# EAGLE board TI_MotorController (EAGLE 9.4.2)
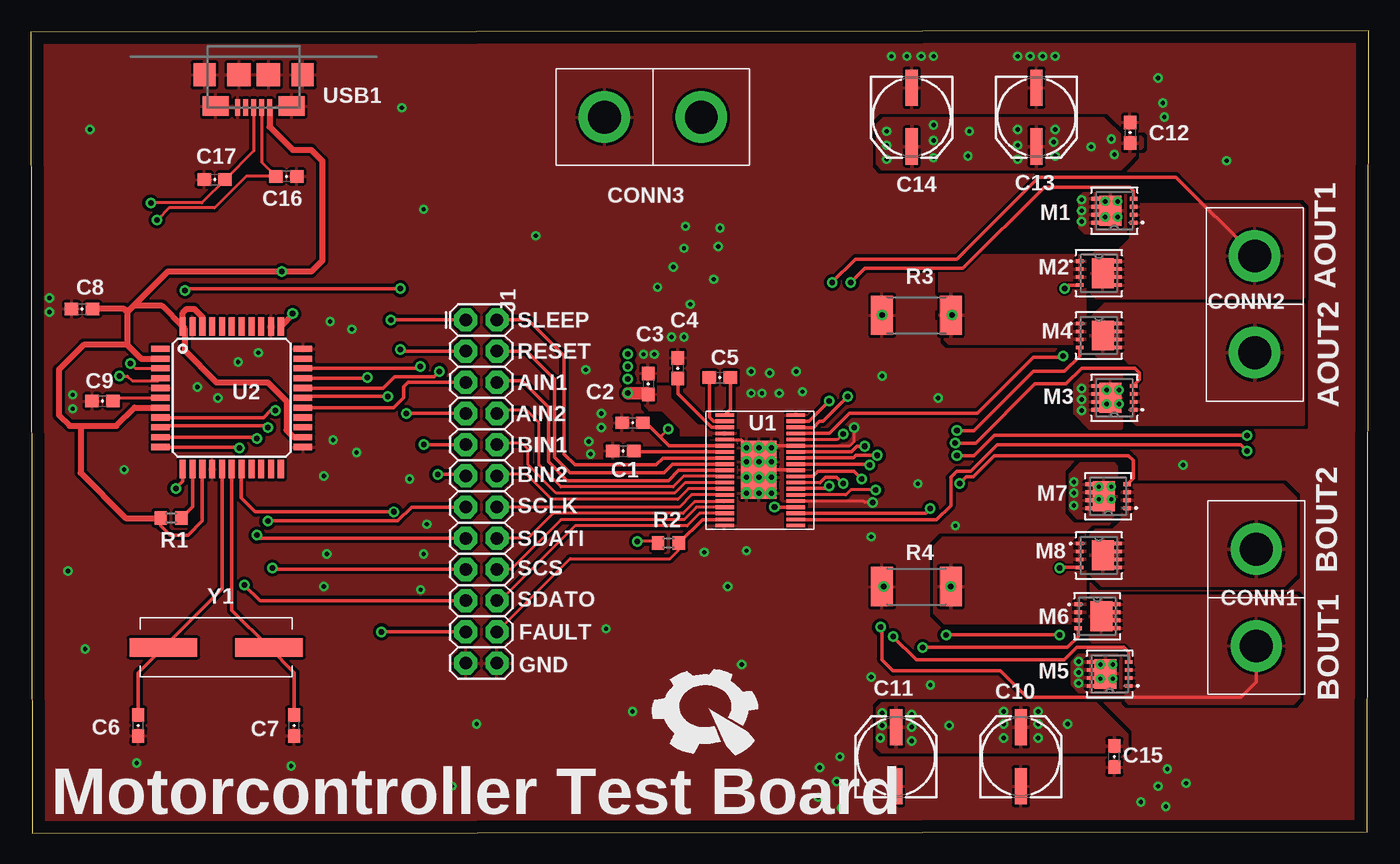
[diagram p0: board, top side]
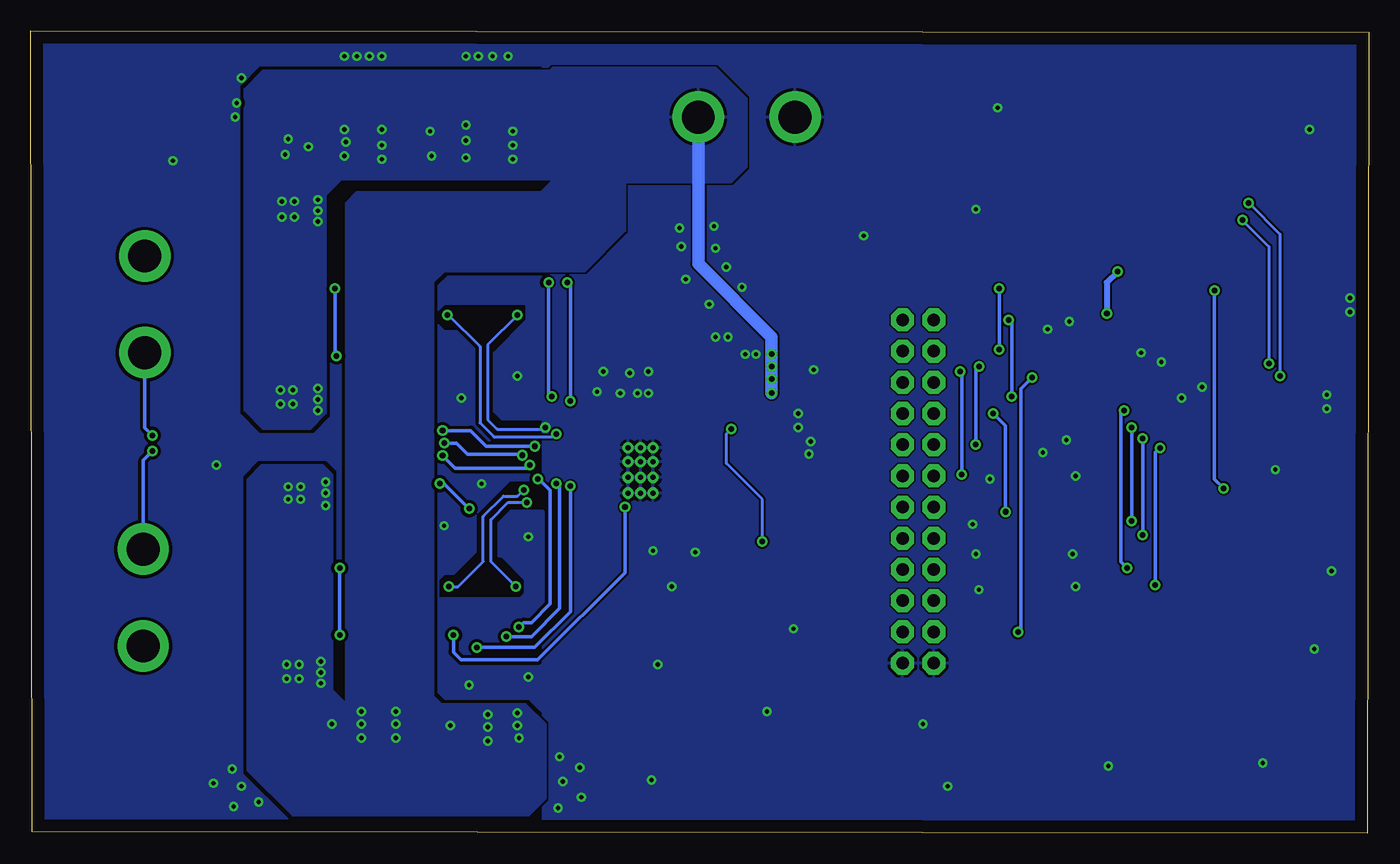
[diagram p1: board, bottom side, seen from below]

Size 108.99 x 65.33 mm. Coordinates in mm from the lower left corner, seen from the top.
Outline: 0.13,0 108.86,0.13 108.99,65.33 0,65.2 0.13,0
Copper layers (1*16): Top 0.035mm / dielectric 1.5mm / Bottom 0.035mm
Design rules "default": minimum track width 6mil, minimum drill 0.35mm, track to track 6mil, track to pad 6mil, pad to pad 6mil, via to via 6mil, smd to smd 6mil, copper to edge 40mil, drill to drill 6mil, minimum pad ring 10mil, minimum via ring 8mil, stop-mask expansion 4mil, vias tented up to drill 0mil, thermal gap 10mil

## Footprints (pad centres in the part's own frame; a part is rotated, then mirrored left to right if it is on the bottom)
0603-CAP = smd 1.1 x 1: 1 -0.85,0; 2 0.85,0
NIPPON_F80 = smd 2.95 x 1: + 2.4,0; - -2.4,0
ANDERSON_VERTICAL = drill 2.667 pad 4.191: PIN1 0,-3.937; PIN2 0,3.937
2X12 = drill 1.016 pad 1.88 octagon: 1 0,0; 2 0,2.54; 3 2.54,0; 4 2.54,2.54; 5 5.08,0; 6 5.08,2.54; 7 7.62,0; 8 7.62,2.54; 9 10.16,0; 10 10.16,2.54; 11 12.7,0; 12 12.7,2.54; 13 15.24,0; 14 15.24,2.54; 15 17.78,0; 16 17.78,2.54; 17 20.32,0; 18 20.32,2.54; 19 22.86,0; 20 22.86,2.54; 21 25.4,0; 22 25.4,2.54; 23 27.94,0; 24 27.94,2.54
DNH0008A = smd 0.61 x 0.305: 1 -1.55,0.975; 2 -1.55,0.325; 3 -1.55,-0.325; 4 -1.55,-0.975 | smd 0.635 x 0.305: 5 1.55,-0.975; 6 1.55,-0.325; 7 1.55,0.325; 8 1.55,0.975 | smd 1.778 x 2.438: 9 0.343,0
R0603 = smd 1 x 1.1: 1 -0.85,0; 2 0.85,0
R2512 = smd 1.8 x 3.2: 1 -2.8,0; 2 2.8,0
HTSSOP(38) = smd 1.5 x 0.3: P1 -2.794,4.064; P2 -2.794,3.564; P3 -2.794,3.064; P4 -2.794,2.564; P5 -2.794,2.064; P6 -2.794,1.564; P7 -2.794,1.064; P8 -2.794,0.564; P9 -2.794,0.064; P10 -2.794,-0.436; P11 -2.794,-0.936; P12 -2.794,-1.436; P13 -2.794,-1.936; P14 -2.794,-2.436; P15 -2.794,-2.936; P16 -2.794,-3.436; P17 -2.794,-3.936; P18 -2.794,-4.436; P19 -2.794,-4.936; P20 3.006,-4.936; P21 3.006,-4.436; P22 3.006,-3.936; P23 3.006,-3.436; P24 3.006,-2.936; P25 3.006,-2.436; P26 3.006,-1.936; P27 3.006,-1.436; P28 3.006,-0.936; P29 3.006,-0.436; P30 3.006,0.064; P31 3.006,0.564; P32 3.006,1.064; P33 3.006,1.564; P34 3.006,2.064; P35 3.006,2.564; P36 3.006,3.064; P37 3.006,3.564; P38 3.006,4.064 | smd 2.9 x 4.7: P39 0,-0.381 | drill 0.4: P40 -1.016,1.397; P41 0,1.397; P42 1.016,1.397; P43 0,-2.286; P44 1.016,-2.286; P45 -1.016,-2.286; P46 -1.016,-1.016; P47 0,-1.016; P48 1.016,-1.016; P49 1.016,0.254; P50 0,0.254; P51 -1.016,0.254
TQFP44 = smd 1.5 x 0.5: 1 -5.8,4; 2 -5.8,3.2; 3 -5.8,2.4; 4 -5.8,1.6; 5 -5.8,0.8; 6 -5.8,0; 7 -5.8,-0.8; 8 -5.8,-1.6; 9 -5.8,-2.4; 10 -5.8,-3.2; 11 -5.8,-4; 23 5.8,-4; 24 5.8,-3.2; 25 5.8,-2.4; 26 5.8,-1.6; 27 5.8,-0.8; 28 5.8,0; 29 5.8,0.8; 30 5.8,1.6; 31 5.8,2.4; 32 5.8,3.2; 33 5.8,4 | smd 0.5 x 1.5: 12 -4,-5.8; 13 -3.2,-5.8; 14 -2.4,-5.8; 15 -1.6,-5.8; 16 -0.8,-5.8; 17 0,-5.8; 18 0.8,-5.8; 19 1.6,-5.8; 20 2.4,-5.8; 21 3.2,-5.8; 22 4,-5.8; 34 4,5.8; 35 3.2,5.8; 36 2.4,5.8; 37 1.6,5.8; 38 0.8,5.8; 39 0,5.8; 40 -0.8,5.8; 41 -1.6,5.8; 42 -2.4,5.8; 43 -3.2,5.8; 44 -4,5.8
USB-MICRO-AB = smd 0.4 x 1.35: P$1 -1.3,1; P$2 -0.65,1; P$3 0,1; P$4 0.65,1; P$5 1.3,1 | smd 2.1 x 1.6: P$6 -3.1,0.875; P$7 3.1,0.875 | smd 1.8 x 1.9: P$8 -4,-1.675; P$9 4,-1.675 | smd 1.9 x 1.9: P$10 -1.2,-1.675; P$11 1.2,-1.675
CRYSTAL-SMD-10.5X4.8-2PIN = smd 5.5 x 1.5: P$1 -4.3,0; P$2 4.3,0

## Placement (x,y rotation side)
C1  1uF  [0603-CAP]  48.26,31.11 0 top
C2  .1uF  [0603-CAP]  49.02,33.4 0 top
C3  .1uF  [0603-CAP]  50.29,36.58 270 top
C4  1uF  [0603-CAP]  52.71,37.85 270 top
C5  .1uF  [0603-CAP]  56.13,37.08 0 top
C6  18pF  [0603-CAP]  8.76,8.76 90 top
C7  18pF  [0603-CAP]  21.46,8.76 90 top
C8  1uF  [0603-CAP]  4.19,42.67 0 top
C9  1uF  [0603-CAP]  5.84,35.18 0 top
C10  220uF  [NIPPON_F80]  80.64,6.22 90 top
C11  220uF  [NIPPON_F80]  70.48,6.22 90 top
C12  .1uF  [0603-CAP]  89.53,57.02 270 top
C13  220uF  [NIPPON_F80]  81.91,58.29 270 top
C14  220uF  [NIPPON_F80]  71.75,58.29 270 top
C15  .1uF  [0603-CAP]  88.27,6.22 90 top
C16  47pF  [0603-CAP]  20.83,53.47 180 top
C17  47pF  [0603-CAP]  14.99,53.21 0 top
CONN1  ANDERSONVERTICAL  [ANDERSON_VERTICAL]  99.82,19.18 0 top
CONN2  ANDERSONVERTICAL  [ANDERSON_VERTICAL]  99.69,43.05 180 top
CONN3  ANDERSONVERTICAL  [ANDERSON_VERTICAL]  50.67,58.29 90 top
J1  CONN_12X2  [2X12]  35.43,41.78 270 top
M1  NMOS_CSD17579Q3A  [DNH0008A]  88.27,50.67 180 top
M2  NMOS_CSD17579Q3A  [DNH0008A]  86.99,45.59 0 top
M3  NMOS_CSD17579Q3A  [DNH0008A]  88.27,35.43 180 top
M4  NMOS_CSD17579Q3A  [DNH0008A]  86.99,40.51 0 top
M5  NMOS_CSD17579Q3A  [DNH0008A]  87.88,12.95 180 top
M6  NMOS_CSD17579Q3A  [DNH0008A]  86.87,17.65 0 top
M7  NMOS_CSD17579Q3A  [DNH0008A]  87.76,27.43 180 top
M8  NMOS_CSD17579Q3A  [DNH0008A]  86.99,22.61 0 top
R1  10k  [R0603]  11.43,25.65 0 top
R2  10k  [R0603]  51.94,23.62 0 top
R3  10m  [R2512]  72.14,42.16 0 top
R4  10m  [R2512]  72.14,20.07 0 top
U1  DRV8704  [HTSSOP(38)]  59.31,29.97 0 top
U2  ATMEGA32U4-AU  [TQFP44]  16.38,35.43 0 top
U$1  [PIE-LOGO-SMALL]  55.25,10.16 0 top
USB1  USB-OTGMICRO-AB  [USB-MICRO-AB]  18.16,60.07 180 top
Y1  [CRYSTAL-SMD-10.5X4.8-2PIN]  15.11,15.11 0 top

## Library data of the parts
C1-C4 C6-C9 C12 C15-C17 = pie; PIE-INT-REF-NUM: CAPACITOR-GENERIC
C5 = pie; PIE-INT-REF-NUM: CAPACITOR-GENERIC; VMAX: 16V
C10 C11 C13 C14 U$1 = pie
CONN1-CONN3 = pie; PIE-INT-REF-NUM: Anderson
J1 = SparkFun-Connectors
M1-M8 = pie; PART_NO: CSD17579Q3A
R1 R2 = pie; DESCRIPTION: RESISTOR, American symbol; DISTRIBUTOR: DigiKey; MANUFACTURER: Rohm Semiconductor; NOTES: Cut Tape; PACKAGE: R0603
R3 R4 = pie; PIE-INT-REF-NUM: RESISTOR-GENERIC
U1 = pie; PART_NO: DRV8704
U2 = pie; PIE-DIGIKEY-PN-ALT1: ATMEGA32U4-MURCT-ND; PIE-DIGIKEY-PN-PRI: ATMEGA32U4RC-MURCT-ND; PIE-INT-REF-NUM: ATmega32U4
USB1 = pie; PIE-DIGIKEY-PN-PRI: H11635CT-ND; PIE-INT-REF-NUM: USB
Y1 = pie; PIE-INT-REF-NUM: CRYSTAL

## Nets
5V: C8.2 R1.1 U2.2 U2.7 U2.14 U2.24 U2.34 U2.42 U2.44 USB1.P$1
12V: C3.2 C10.+ C11.+ C12.2 C13.+ C14.+ C15.2 CONN3.PIN1 M1.5 M1.6 M1.7 M1.8 M1.9 M3.5 M3.6 M3.7 M3.8 M3.9 M5.5 M5.6 M5.7 M5.8 M5.9 M7.5 M7.6 M7.7 M7.8 M7.9 U1.P4
A1HS: M1.4 U1.P36
A1LS: M2.4 U1.P35
A2HS: M3.4 U1.P31
A2LS: M4.4 U1.P32
AIN1: J1.5 U2.27
AIN1M: J1.6 U1.P10
AIN2: J1.7 U2.18
AIN2M: J1.8 U1.P11
AISENP: M2.1 M2.2 M2.3 M4.1 M4.2 M4.3 R3.2 U1.P34
AOUT1: CONN2.PIN1 M1.1 M1.2 M1.3 M2.5 M2.6 M2.7 M2.8 M2.9 U1.P37
AOUT2: CONN2.PIN2 M3.1 M3.2 M3.3 M4.5 M4.6 M4.7 M4.8 M4.9 U1.P30
B1HS: M5.4 U1.P27
B1LS: M6.4 U1.P26
B2HS: M7.4 U1.P22
B2LS: M8.4 U1.P23
BIN1: J1.9 U2.31
BIN1M: J1.10 U1.P12
BIN2: J1.11 U2.29
BIN2M: J1.12 U1.P13
BOUT1: CONN1.PIN1 M5.1 M5.2 M5.3 M6.5 M6.6 M6.7 M6.8 M6.9 U1.P28
BOUT2: CONN1.PIN2 M7.1 M7.2 M7.3 M8.5 M8.6 M8.7 M8.8 M8.9 U1.P21
D+: C17.2 U2.4 USB1.P$3
D-: C16.2 U2.3 USB1.P$2
FAULTN: J1.21 U2.30
FAULTNM: J1.22 R2.2 U1.P18
GND: C1.1 C2.1 C3.1 C4.1 C6.1 C7.1 C8.1 C9.1 C10.- C11.- C12.1 C13.- C14.- C15.1 C16.1 C17.1 CONN3.PIN2 J1.23 J1.24 R3.1 R4.1 U1.P5 U1.P19 U1.P24 U1.P29 U1.P33 U1.P38 U1.P39 U1.P40 U1.P41 U1.P42 U1.P43 U1.P44 U1.P45 U1.P46 U1.P47 U1.P48 U1.P49 U1.P50 U1.P51 U2.5 U2.15 U2.23 U2.33 U2.35 U2.43 USB1.P$5 USB1.P$6 USB1.P$7 USB1.P$8 USB1.P$9 USB1.P$10 USB1.P$11
N$1: C1.2 U1.P7
N$2: C2.2 R2.1 U1.P6
N$3: R1.2 U2.13
N$4: C4.2 U1.P3
N$5: C5.1 U1.P2
N$6: C5.2 U1.P1
N$7: C7.2 U2.17 Y1.P$2
N$8: C6.2 U2.16 Y1.P$1
N$11: C9.2 U2.6
N$16: M6.1 M6.2 M6.3 M8.1 M8.2 M8.3 R4.2 U1.P25
RESET: J1.3 U2.12
RESETM: J1.4 U1.P9
SCLK: J1.13 U2.9
SCLKM: J1.14 U1.P14
SCS: J1.17 U2.8
SCSM: J1.18 U1.P16
SDATI: J1.15 U2.10
SDATIM: J1.16 U1.P15
SDATO: J1.19 U2.11
SDATOM: J1.20 U1.P17
SLEEP: J1.1 U2.28
SLEEPM: J1.2 U1.P8

## Tracks (layer width: path | path; a pad name or v marks a point on that pad's centre or on a via)
5V  (via drill 0.45)
  Top 0.305: U2.14 13.98,25.41 12.83,24.26 11.34,24.26 10.58,25.02 R1.1
  Top 0.508: USB1.P$1 19.46,57.5 21.34,55.63 22.86,55.63 23.75,54.74 23.75,46.61 22.86,45.72 v20.45,45.72 11.18,45.72 8.38,42.93 | v21.34,42.29 21.34,42.19 U2.34 | 8.38,42.93 7.87,42.42 | 7.87,42.42 7.87,39.75 | 7.87,39.75 9.02,38.61 9.04,38.63 U2.2 | U2.44 10.69,42.93 8.38,42.93 | U2.44 12.38,42.35 12.7,42.67 13.34,42.67 13.98,42.02 U2.42 | 7.87,39.75 4.32,39.75 2.29,37.72 2.29,34.04 3.17,33.15 4.06,33.15 | 7.87,42.42 7.62,42.67 C8.2 | 4.06,33.15 6.98,33.15 8.47,34.63 U2.7 | 4.06,33.15 4.06,29.34 7.75,25.65 R1.1 | U2.44 12.53,41.09 12.53,39.3 15.12,36.7 19.3,36.7 20.83,35.18 20.83,32.81 21.41,32.23 U2.24
  Bottom 0.508: v20.45,45.72 21.34,44.83 v21.34,42.29
12V  (via drill 0.35, 0.45)
  Top 0.813: 50.25,35.69 C3.2
  Top 1.016: v48.64,35.81 50.13,35.81 50.25,35.69
  Bottom 1.016: CONN3.PIN1 54.61,46.35 48.64,40.39 v48.64,38.99 v48.64,37.97 v48.64,36.96 v48.64,35.81
  other vias: 69.72,57.15 69.72,56.01 69.72,54.86 73.53,57.66 73.53,56.39 73.53,54.99 76.45,57.15 76.33,55.12 80.39,57.28 80.39,56.01 80.39,54.86 83.44,57.28 83.31,56.26 83.44,55.12 88.01,56.52 88.27,55.24 86.36,55.88 69.34,9.78 69.34,8.76 69.21,7.75 71.75,9.65 71.75,8.64 71.75,7.49 74.8,8.76 79.25,9.91 79.25,8.89 79.25,7.75 82.04,9.91 82.04,8.89 82.04,7.75 84.45,8.89 87.5,51.44 88.52,51.44 87.5,50.16 88.52,50.16 85.6,51.56 85.6,50.67 85.6,49.78 87.63,36.07 88.65,36.07 87.63,34.92 88.65,34.92 85.6,36.2 85.6,35.31 85.6,34.42 86.99,28.19 88.01,28.19 88.01,27.18 86.99,27.18 84.96,28.57 84.96,27.69 84.96,26.67 87.12,13.72 88.14,13.72 87.12,12.57 88.14,12.57 85.34,13.97 85.34,13.08 85.34,12.19
  pour Bottom (isolate 0.254): 90.04,62.1 53.21,62.1 50.67,59.56 50.67,54.48 51.94,53.21 83.69,53.21 84.96,51.94 84.96,34.16 86.23,32.89 90.04,32.89 91.57,34.42 91.57,60.58
  pour Top (isolate 0.254): 88.9,37.59 84.96,37.59 84.96,34.16 86.23,32.89 88.77,32.89 88.9,33.02
  pour Top (isolate 0.254): 85.47,30.1 84.58,29.21 84.58,26.29 85.22,25.65 88.01,25.65 88.52,26.16 88.52,29.84 88.27,30.1
  pour Bottom (isolate 0.254): 53.21,62.36 50.67,59.82 50.67,54.23 51.94,52.96 60.58,52.96 60.58,49.02 63.88,45.72 75.31,45.72 76.2,44.83 76.2,11.18 75.56,10.54 68.71,10.54 67.06,8.89 67.06,2.79 68.45,1.4 87.63,1.4 91.31,5.08 91.31,28.83 90.17,29.97 85.22,29.97 84.45,29.21 84.45,11.68 83.31,10.54 83.31,51.31 82.42,52.2 67.44,52.2 66.55,53.09 66.55,62.23 66.42,62.36
  pour Top: 87.38,58.17 69.47,58.17 68.96,57.66 68.96,54.48 69.34,54.1 88.77,54.1 90.55,55.88 90.55,56.52 90.3,56.77 88.77,56.77
  pour Top: 86.74,10.54 69.34,10.54 68.96,10.16 68.96,6.99 69.34,6.6 89.03,6.6 89.28,6.86 89.28,8
  pour Top: 88.52,14.48 85.34,14.48 84.84,13.97 84.84,12.06 85.47,11.43 88.39,11.43 88.77,11.81 88.77,14.22
  pour Top: 89.03,52.07 85.72,52.07 85.47,51.82 85.47,49.28 85.85,48.9 89.15,48.9 89.15,51.94
  pour Top: 49.78,36.32 49.78,35.05 50.42,34.42 51.44,34.42 52.96,32.89 52.96,32.38 57.28,32.38 57.4,32.51 57.4,32.77 55.25,32.77 54.86,33.15 54.36,33.15 52.07,35.43 52.07,36.32
A1HS  (via drill 0.45)
  Top 0.305: M1.4 89.81,52.3 89.53,52.58 82.55,52.58 75.95,45.97 67.94,45.97 v66.8,44.83 | v66.55,35.56 64.52,33.53 64.26,33.53 63.75,33.02 62.33,33.02 U1.P36
  Bottom 0.305: v66.8,44.83 66.8,35.81 v66.55,35.56
A1LS  (via drill 0.45)
  Top 0.305: M2.4 84.5,44.62 v84.2,44.32 | v84.07,38.86 83.95,38.73 81.66,38.73 77.09,34.16 66.67,34.16 65.05,32.54 U1.P35
  Bottom 0.305: v84.2,44.32 84.2,38.99 v84.07,38.86
A2HS  (via drill 0.45)
  Top 0.305: M3.4 90.3,36.89 90.3,37.47 89.92,37.85 85.6,37.85 84.33,36.58 81.79,36.58 76.97,31.76 v75.31,31.76 | v68.96,30.76 67.2,30.76 67.02,30.58 62.36,30.58 U1.P31
  Bottom 0.305: v75.31,31.76 74.3,31.76 73.41,30.86 69.06,30.86 v68.96,30.76
A2LS  (via drill 0.45)
  Top 0.305: M4.4 85.44,38.84 84.2,37.59 81.66,37.59 76.83,32.77 v75.44,32.77 | v67.94,31.5 67.29,31.5 66.85,31.06 62.34,31.06 U1.P32
  Bottom 0.305: v75.44,32.77 73.15,32.77 71.88,31.5 v67.94,31.5
AIN1
  Top 0.305: J1.5 30.73,36.7 30.35,36.32 30.35,35.43 29.55,34.63 U2.27
AIN1M
  Top 0.305: U1.P10 52.78,29.54 51.94,28.7 43.69,28.7 42.16,30.23 42.16,34.67 40.01,36.83 38.1,36.83 J1.6
AIN2  (via drill 0.45)
  Top 0.305: J1.7 v30.61,34.16 | v29.59,26.16 18.29,26.16 17.14,27.3 17.14,29.59 U2.18
  Bottom 0.305: v30.61,34.16 29.59,33.15 v29.59,26.16
AIN2M
  Top 0.254: U1.P11 53.17,29.04 52.32,28.19 43.18,28.19 41.4,29.97 41.4,33.4 40.39,34.42 38.23,34.42 J1.8
AISENP  (via drill 0.45)
  Top 0.254: v66.17,32.51 65.69,32.04 U1.P34
  Bottom 0.254: v75.06,42.16 R3.2 72.39,39.62 72.39,33.4 71.25,32.26 66.42,32.26 v66.17,32.51
  pour Top: 85.47,46.99 74.8,46.99 74.04,46.23 74.04,40.64 74.8,39.88 85.6,39.88 85.85,40.13 85.85,46.61
AOUT1  (via drill 0.45)
  Top 0.305: CONN2.PIN1 93.27,53.42 82.12,53.42 75.44,46.74 67.18,46.74 v65.28,44.83 | U1.P37 62.32,33.53 63.37,33.53 v65.02,35.18
  Bottom 0.305: v65.28,44.83 65.02,44.58 v65.02,35.18
  pour Top: 103.76,43.69 103.76,50.8 103.38,51.18 89.66,51.18 89.53,51.05 89.53,48.39 88.52,47.37 86.74,47.37 86.36,46.99 86.36,43.94 86.74,43.56 103.63,43.56
AOUT2  (via drill 0.45)
  Top 0.305: v75.44,30.73 76.83,30.73 78.49,32.38 v99.06,32.38 | v68.33,29.97 68.26,30.04 U1.P30
  Bottom 0.305: CONN2.PIN2 99.69,33.02 v99.06,32.38 | v75.44,30.73 74.42,29.72 68.58,29.72 v68.33,29.97
  pour Top: 103.63,43.05 87.5,43.05 86.36,41.91 86.36,39.37 86.99,38.73 89.03,38.73 89.66,38.1 89.66,33.66 90.04,33.27 103.63,33.27
B1HS  (via drill 0.45)
  Top 0.254: 64.28,28.54 U1.P27
  Top 0.305: M5.4 89.43,14.71 89.03,15.11 85.22,15.11 84.2,14.1 72.14,14.1 v70.23,16 | v66.17,28.45 65.64,28.98 64.72,28.98 64.28,28.54
  Bottom 0.305: v70.23,16 68.2,16 65.91,18.29 65.91,28.19 v66.17,28.45
B1LS  (via drill 0.45)
  Top 0.305: M6.4 85.32,15.98 84.45,15.11 v72.64,15.11 | v65.02,28.24 64.9,28.24 64.73,28.08 62.36,28.08 U1.P26
  Bottom 0.305: v65.02,28.24 65.02,18.03 67.94,15.11 v72.64,15.11
B2HS  (via drill 0.45)
  Top 0.305: M7.4 89.79,28.89 89.79,30.35 89.41,30.73 78.5,30.73 76.77,29.01 76.22,29.01 v75.66,28.45 | v73.28,26.42 72.9,26.04 U1.P22
  Bottom 0.305: v75.66,28.45 75.31,28.45 v73.28,26.42
B2LS  (via drill 0.45)
  Top 0.305: M8.4 83.86,21.63 v83.82,21.59 | v60.58,26.54 U1.P23 | v83.82,16.13 v74.55,16.13
  Bottom 0.305: v83.82,21.59 v83.82,16.13 | v74.55,16.13 74.55,14.73 73.91,14.1 67.69,14.1 60.58,21.21 v60.58,26.54
BIN1  (via drill 0.45)
  Top 0.305: J1.9 v32,31.62 | v31.75,37.97 31.61,37.83 U2.31
  Bottom 0.305: v32,31.62 32,37.72 v31.75,37.97
BIN1M
  Top 0.254: U1.P12 53.3,28.54 52.45,27.69 42.8,27.69 40.51,29.97 40.51,31.24 40.01,31.75 38.1,31.75 J1.10
BIN2  (via drill 0.45)
  Top 0.305: J1.11 35.31,29.21 v33.15,29.21 | v33.27,37.59 32.84,37.16 29.65,37.16 28.72,36.23 U2.29
  Bottom 0.305: v33.15,29.21 33.15,37.47 v33.27,37.59
BIN2M
  Top 0.254: U1.P13 53.56,28.04 52.71,27.18 42.42,27.18 40.39,29.21 38.1,29.21 J1.12
BOUT1  (via drill 0.45)
  Top 0.305: CONN1.PIN1 99.82,12.32 98.55,11.05 81.15,11.05 78.99,13.21 70.23,13.21 69.34,14.1 69.34,16.64 v69.21,16.76 | v67.69,28.83 67.06,29.46 64.13,29.46 63.71,29.04 U1.P28
  Bottom 0.305: v69.21,16.76 68.83,17.14 68.2,17.14 66.67,18.67 66.67,27.92 67.58,28.83 v67.69,28.83
  pour Top: 102.36,19.3 86.36,19.3 86.23,19.18 86.23,15.75 86.49,15.49 89.15,15.49 89.92,14.73 89.92,13.59 89.79,13.46 89.15,13.46 89.15,10.79 89.41,10.54 102.87,10.54 103.38,11.05 103.38,19.05 103.12,19.3
BOUT2  (via drill 0.45)
  Top 0.305: v99.06,31.11 98.55,31.62 78.74,31.62 76.58,29.46 75.44,29.46 74.93,28.96 74.93,26.67 73.79,25.53 62.32,25.53 U1.P21
  Bottom 0.305: CONN1.PIN2 99.82,30.35 v99.06,31.11
  pour Top: 87.25,20.19 102.11,20.19 103,21.08 103,27.3 101.98,28.32 89.28,28.32 88.9,27.94 88.9,25.4 88.14,24.64 86.74,24.64 86.36,24.26 86.36,21.08
D+  (via drill 0.45)
  Top 0.254: USB1.P$3 18.16,55.54 C17.2 13.93,51.31 v9.78,51.31 | v7.24,37.21 7.87,37.21 8.26,36.83 10.38,36.83 U2.4
  Bottom 0.254: v9.78,51.31 7.24,48.77 v7.24,37.21
D-  (via drill 0.45)
  Top 0.254: USB1.P$2 18.81,54.63 C16.2 17.54,53.47 14.97,50.9 11.28,50.9 v10.29,49.91 | v8.13,38.23 8.52,37.83 U2.3
  Bottom 0.254: v10.29,49.91 8.13,47.75 v8.13,38.23
FAULTN  (via drill 0.45)
  Top 0.305: J1.21 v28.57,16.38 | v27.43,37.08 27.38,37.03 U2.30
  Bottom 0.305: v28.57,16.38 28.32,16.64 28.32,36.2 v27.43,37.08
FAULTNM
  Top 0.254: J1.22 43.94,22.35 52.07,22.35 52.79,23.07 R2.2
  Top 0.305: R2.2 54.7,25.53 56.51,25.53 U1.P18
GND  (via drill 0.35, 0.45)
  Top 0.254: v68.58,26.92 67.94,26.92 67.83,27.04 U1.P24 | v67.06,33.02 67.06,31.88 66.67,31.5 62.36,31.5 U1.P33 | U1.P5 57.88,32.04 58.29,31.62 U1.P40
  Top 0.305: U1.P29 62.27,29.58 61.44,29.58 61.43,29.59 60.33,29.59 U1.P49 | U1.P33 60.49,31.54 U1.P42
  Bottom 0.254: v69.47,20.07 71.5,22.1 71.5,25.53 70.1,26.92 v68.58,26.92 | v69.34,42.16 71.75,39.75 71.75,33.66 70.99,32.89 67.18,32.89 v67.06,33.02
  other vias: 93.85,29.97 68.45,12.7 73.28,12.06 68.45,24.13 72.26,28.45 73.91,35.43 69.34,37.21 75.31,25.02 97.41,54.74 58.67,35.81 59.56,35.81 60.96,35.81 62.87,35.94 58.67,37.59 60.2,37.47 62.36,37.59 56.13,49.28 56.01,47.75 55.63,45.09 53.72,43.05 53.34,49.4 53.21,47.62 52.32,46.1 51.05,44.45 56.77,20.07 46.86,16.64 57.91,13.72 49.02,9.91 58.42,4.32 36.32,8.89 34.29,3.81 8.64,5.71 21.21,5.46 1.52,42.42 3.43,35.69 3.43,34.54 1.52,43.56 3.05,21.34 4.83,57.28 30.23,59.05 32,50.8 41.15,48.64 45.21,37.72 46.48,34.16 46.48,33.02 45.47,31.88 45.59,30.86 49.91,38.99 50.8,38.99 52.2,40.39 53.21,40.39 70.1,63.25 71.37,63.25 72.52,63.25 80.39,63.25 81.41,63.25 82.42,63.25 83.44,63.25 73.53,63.25 16.89,38.35 18.54,39.12 24.38,41.66 26.16,41.02 24.64,32 26.54,30.99 23.88,29.08 30.86,28.83 4.44,14.99 7.62,29.59 13.59,36.32 15.24,35.43 54.86,22.86 58.29,22.99 92.58,5.21 91.82,3.81 90.42,2.54 65.91,6.22 65.66,4.19 66.04,2.03 64.26,5.33 64.13,2.92 94.11,4.06 92.46,2.16 92.2,59.44 92.33,58.29 91.82,61.47 24.13,22.73 23.88,20.07 31.75,19.81 32,22.73 32.26,25.15
  pour Top (isolate 0.254, rank 2): -0.25,67.18 109.22,67.18 109.22,-1.27 -0.25,-1.27
  pour Bottom (rank 2): -0.51,68.07 67.31,68.07 67.31,-0.38 -0.51,-0.38
  pour Bottom (isolate 0.254, rank 2): 66.8,28.7 69.98,28.7 72.77,25.91 72.77,22.86 74.55,21.08 75.31,21.08 75.82,20.57 75.82,19.18 69.09,19.18 68.71,19.56 68.71,20.57 70.61,22.48 70.87,22.48 70.87,25.27 69.85,26.29 67.31,26.29 67.18,26.16 67.18,0.25 67.31,0.13 110.11,0.13 110.11,30.35 109.09,31.37 66.8,31.37 66.55,31.11 66.55,28.96
  pour Bottom (isolate 0.254, rank 2): 66.67,33.66 70.61,33.66 71.25,34.29 71.25,39.12 68.58,41.78 68.58,42.93 68.71,43.05 75.31,43.05 76.07,42.29 76.07,41.66 75.31,40.89 74.3,40.89 72.77,39.37 72.77,33.15 71.5,31.88 66.93,31.88 66.93,31.11 108.58,31.11 109.35,31.88 109.35,64.77 107.95,66.17 67.18,66.17 66.55,65.53 66.55,33.78
N$1
  Top 0.305: U1.P7 49.19,31.04 C1.2
N$2  (via drill 0.45)
  Top 0.254: R2.1 50.97,23.75 v49.4,23.75 | v51.94,32.89 51.35,32.3 51.23,32.3
  Top 0.305: U1.P6 51.99,31.54 51.23,32.3 50.13,33.4 C2.2
  Bottom 0.254: v49.4,23.75 49.4,27.18 52.32,30.1 52.32,32.51 v51.94,32.89
N$3
  Top 0.305: U2.13 13.18,26.56 R1.2
N$4
  Top 0.305: U1.P3 55.44,33.04 52.71,35.77 C4.2
N$5
  Top 0.305: C5.1 55.28,33.87 55.63,33.53 55.63,33.54 U1.P2
N$6
  Top 0.305: C5.2 56.98,34.51 U1.P1
N$7
  Top 0.305: U2.17 16.38,18.14 Y1.P$2 21.46,13.06 C7.2
N$8
  Top 0.305: U2.16 15.58,19.88 Y1.P$1 8.76,13.06 C6.2
N$11
  Top 0.254: C9.2 6.95,35.43 U2.6
N$16  (via drill 0.45)
  Top 0.254: v68.83,27.94 66.8,27.94 66.4,27.54 U1.P25
  Bottom 0.254: v74.93,20.07 74.17,20.07 72.14,22.1 72.14,25.78 70.48,27.43 69.34,27.43 v68.83,27.94
  pour Top: 85.6,24 74.3,24 73.66,23.37 73.66,17.91 74.42,17.14 85.34,17.14 85.85,17.65 85.85,23.75
RESET  (via drill 0.45)
  Top 0.305: J1.3 30.23,39.24 v30.1,39.37 | v30.1,44.32 12.7,44.32 v12.57,44.2 | v11.81,28.07 12.38,28.64 U2.12
  Bottom 0.305: v30.1,39.37 v30.1,44.32 | v12.57,44.2 12.57,28.83 v11.81,28.07
RESETM
  Top 0.305: U1.P9 52.26,30.04 51.56,29.34 43.94,29.34 42.67,30.61 42.67,36.96 40.39,39.24 J1.4
SCLK  (via drill 0.45)
  Top 0.305: J1.13 31.01,26.54 29.89,25.43 19.3,25.43 v19.3,25.4 | v19.3,33.02 19.18,33.15 10.7,33.15 U2.9
  Bottom 0.305: v19.3,33.02 v19.3,25.4
SCLKM
  Top 0.254: U1.P14 53.83,27.54 52.83,26.54 J1.14
SCS  (via drill 0.45)
  Top 0.305: J1.17 19.81,21.46 v19.68,21.59 | v19.94,34.42 19.56,34.42 18.97,33.83 U2.8
  Bottom 0.305: v19.68,21.59 20.19,22.1 20.19,34.16 v19.94,34.42
SCSM
  Top 0.254: U1.P16 54.22,26.54 53.21,25.53 43.18,25.53 39.12,21.46 J1.18
SDATI  (via drill 0.45)
  Top 0.305: J1.15 18.67,24 v18.41,24.26 | v18.41,32.13 18.31,32.23 U2.10
  Bottom 0.305: v18.41,32.13 v18.41,24.26
SDATIM
  Top 0.254: U1.P15 56.44,26.96 54.08,26.96 53.15,26.04 42.55,26.04 40.51,24 J1.16
SDATO  (via drill 0.45)
  Top 0.305: J1.19 18.67,18.92 v17.4,20.19 | v17.02,31.37 16.95,31.43 U2.11
  Bottom 0.305: v17.4,20.19 17.4,30.99 v17.02,31.37
SDATOM
  Top 0.254: U1.P17 54.48,26.04 53.47,25.02 44.32,25.02 38.23,18.92 J1.20
SLEEP  (via drill 0.45)
  Top 0.305: J1.1 v29.34,41.78 | v29.08,35.56 22.31,35.56 U2.28
  Bottom 0.305: v29.34,41.78 29.08,41.53 v29.08,35.56
SLEEPM
  Top 0.305: U1.P8 51.49,30.54 50.93,29.97 44.32,29.97 43.43,30.86 43.43,38.86 40.51,41.78 J1.2

## Text on the board
tNames: AOUT1 | SLEEP | RESET | AIN1 | AOUT2 | AIN2 | BIN1 | BIN2 | SCLK | SDATI | SCS | BOUT2 | SDATO | FAULT | GND | BOUT1 | Motorcontroller Test Board